# Allegro board Z_FLASH.brd
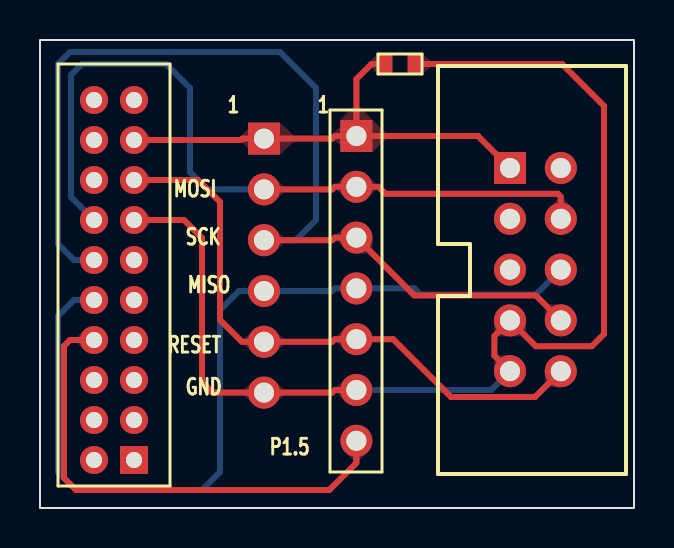
[diagram p0: board, top side]
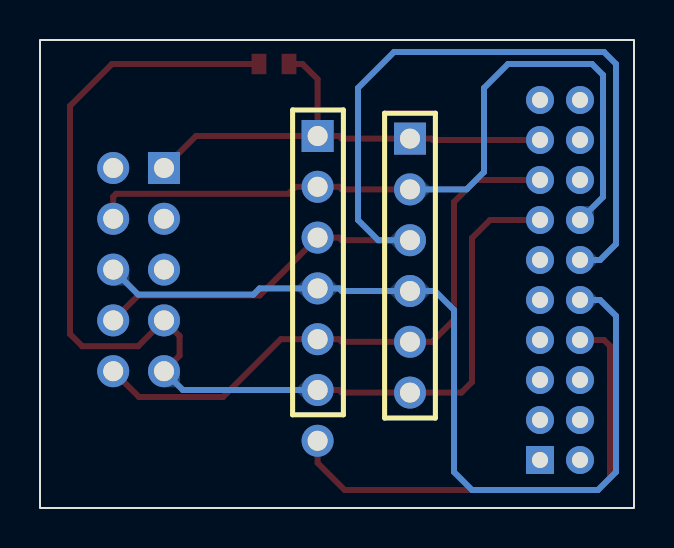
[diagram p1: board, bottom side, seen from below]

Outline 29.7 x 23.4 mm; copper layers: TOP, BOTTOM. Coordinates in mm from the lower left corner of the outline.
Outline path: rectangle 0,0 29.7,23.4

## Design rules (mm)
constraint set DEFAULT: min track width 0.3

## Placement (name value [footprint] x y rotation side)
C1  104  [CAP_SMD_0603]  18 22.2 0 top
J1  SENSOR  [J1_7_254]  20.9 18.6 270 top
J2  CON20  [J2_20_200]  4.7 2.4 90 top
J3  SWITCH  [J1_6_254]  11.2 17.2 270 top
J4  ZWAVE ISP  [HEADER5X2X254]  23.5 17 90 top

## Library data of the parts
C1 = CAPACITOR NON-POL
J1 = CON7
J2 = CON20
J3 = CON6
J4 = CON10

## Footprints (pads in the part's own frame, mm; a bottom-side part is the same pattern mirrored in y, then rotated)
CAP_SMD_0603
  rect 0.74x1.02 smd: 1(-0.75,0) 2(0.75,0)
HEADER5X2X254
  rect 1.6x1.6 hole 1: 1(0,0)
  round 1.6 hole 1: 2(0,-2.54) 3(-2.54,0) 4(-2.54,-2.54) 5(-5.08,0) 6(-5.08,-2.54) 7(-7.62,0) 8(-7.62,-2.54) 9(-10.16,0) 10(-10.16,-2.54)
J1_6_254
  rect 1.6x1.6 hole 1: 1(-1.27,0)
  round 1.6 hole 1: 2(1.27,0) 3(3.81,0) 4(6.35,0) 5(8.89,0) 6(11.43,0)
J1_7_254
  rect 1.6x1.6 hole 1: 1(0,-5.08)
  round 1.6 hole 1: 2(2.54,-5.08) 3(5.08,-5.08) 4(7.62,-5.08) 5(10.16,-5.08) 6(12.7,-5.08) 7(15.24,-5.08)
J2_20_200
  rect 1.4x1.4 hole 0.8: 1(0,0)
  round 1.4 hole 0.8: 2(0,2) 3(2,0) 4(2,2) 5(4,0) 6(4,2) 7(6,0) 8(6,2) 9(8,0) 10(8,2) 11(10,0) 12(10,2) 13(12,0) 14(12,2) 15(14,0) 16(14,2) 17(16,0) 18(16,2) 19(18,0) 20(18,2)

## Nets
3V3: C1.1 J1.1 J2.17 J3.1 J4.1
GND: C1.2 J1.6 J2.13 J3.6 J4.7 J4.9
MISO: J1.4 J2.10 J3.4 J4.6
MOSI: J1.2 J2.14 J3.2 J4.4
P1.4: J1.3 J2.12 J3.3 J4.8
P1.5: J1.7 J2.8
ZWAVE_RESET: J1.5 J2.15 J3.5 J4.10

Pads without a net: J2 1 2 3 4 5 6 7 9 11 16 18 19 20; J4 2 3 5

## Routing (per net, layer and track width the routed paths; a pad name or vN(x,y) marks a point on that pad's centre or on a via; arc(x,y) is an arc through that point)
3V3: length 24.1
  TOP w0.3: J1.1 14.74,18.6 14.61,18.47 J3.1 10.12,18.47 10.05,18.4 J2.17 ; J1.1 15.82,21.44 16.58,22.2 C1.1 ; J1.1 21.9,18.6 J4.1
GND: length 57.4
  TOP w0.3: J2.13 7.2,14.4 8.1,13.5 8.1,6.3 8.63,5.77 J3.6 14.61,5.77 14.74,5.9 J1.6 ; J4.9 22.72,7.62 22.72,8.6 J4.7 24.79,8.09 27.59,8.09 28.2,8.7 28.2,20.1 26.1,22.2 C1.2
  BOTTOM w0.3: J4.9 22.56,5.9 J1.6
MISO: length 45
  BOTTOM w0.3: J4.6 24.79,10.67 19.03,10.67 18.72,10.98 J1.4 14.74,10.98 14.61,10.85 J3.4 9.95,10.85 9,9.9 9,1.8 8.1,0.9 1.8,0.9 0.9,1.8 0.9,9.6 1.7,10.4 J2.10
MOSI: length 38.9
  TOP w0.3: J3.2 14.61,15.93 14.74,16.06 J1.2 16.92,16.06 17.27,15.71 25.89,15.71 26.04,15.56 J4.4
  BOTTOM w0.3: J2.14 1.55,15.55 1.55,21.65 2.1,22.2 6.3,22.2 7.5,21 7.5,16.8 8.37,15.93 J3.2
P1.4: length 51.3
  TOP w0.3: J3.3 14.61,13.39 14.74,13.52 J1.3 18.71,10.63 24.79,10.63 J4.8
  BOTTOM w0.3: J3.3 12.79,13.39 13.8,14.4 13.8,21 12,22.8 1.5,22.8 0.9,22.2 0.9,13.2 1.7,12.4 J2.12
P1.5: length 24.8
  TOP w0.3: J1.7 15.82,2.26 14.46,0.9 1.8,0.9 1.2,1.5 1.2,8.1 1.5,8.4 J2.8
ZWAVE_RESET: length 29.9
  TOP w0.3: J4.10 24.75,5.55 20.55,5.55 17.66,8.44 J1.5 14.74,8.44 14.61,8.31 J3.5 10.1,8.31 9,9.41 9,15.3 7.9,16.4 J2.15

Small or netless copper shapes (teardrops, artwork), in the pictures only: 30 on TOP, 12 on BOTTOM

## Text on the board
Ref Des/Silkscreen Top: RESET | MOSI | SCK | GND | MISO | P1.5
